# Altium PCB PenAndPaper.PcbDoc
Units mm, origin at the board's own origin, x right, y up, seen from the top; angles counter-clockwise.
Board outline 100 x 45 mm, 2 copper layers (Top Layer, Bottom Layer); 21 components, 19 nets, 120 pads, 40 vias.
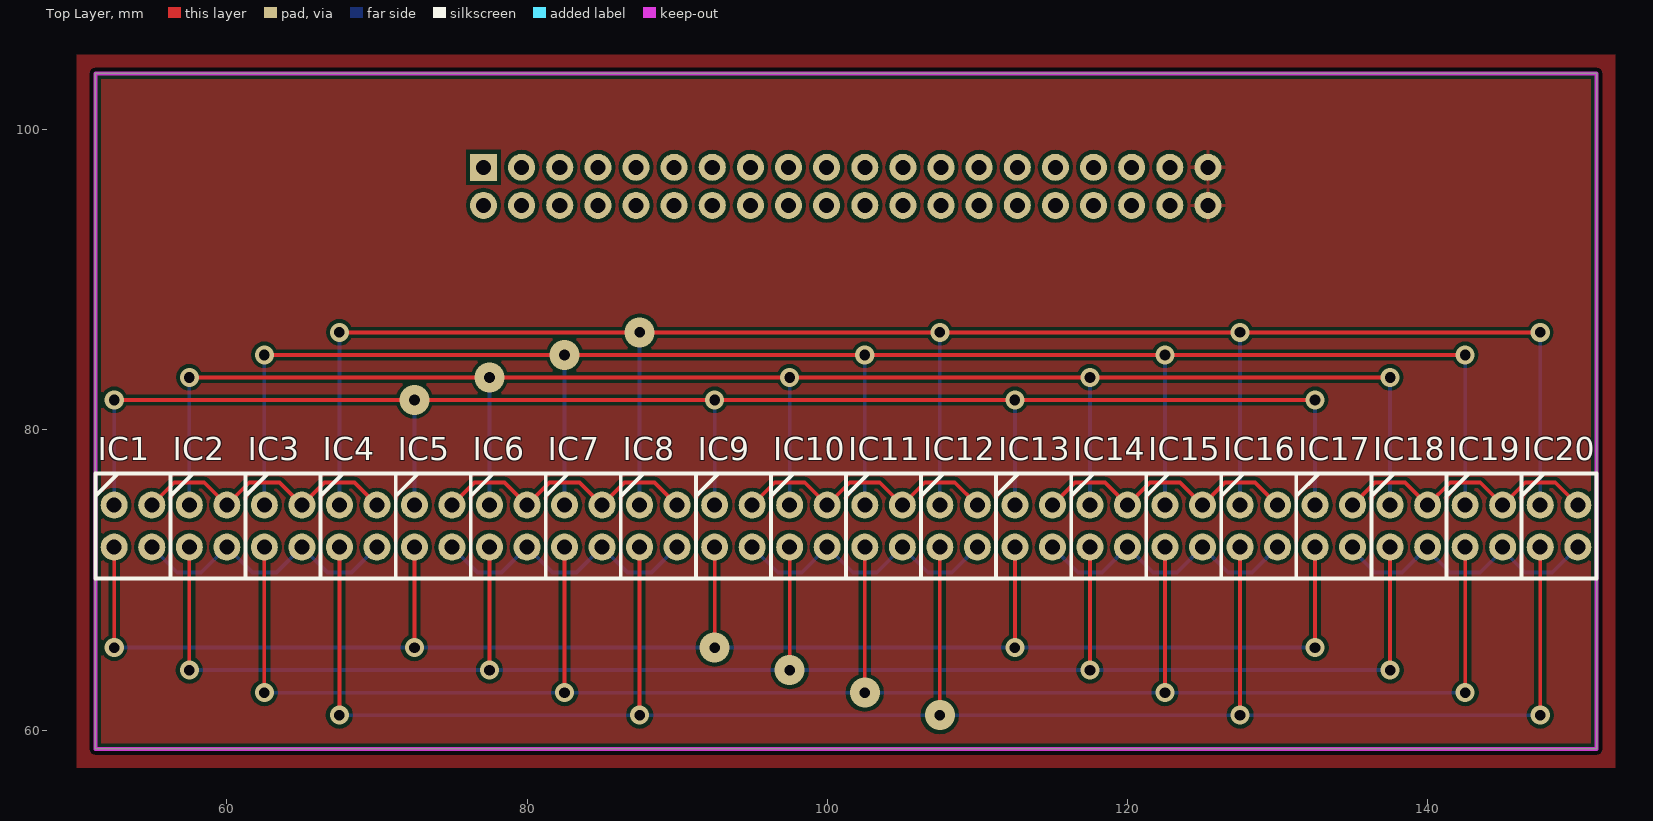
[diagram p0: Top Layer view]
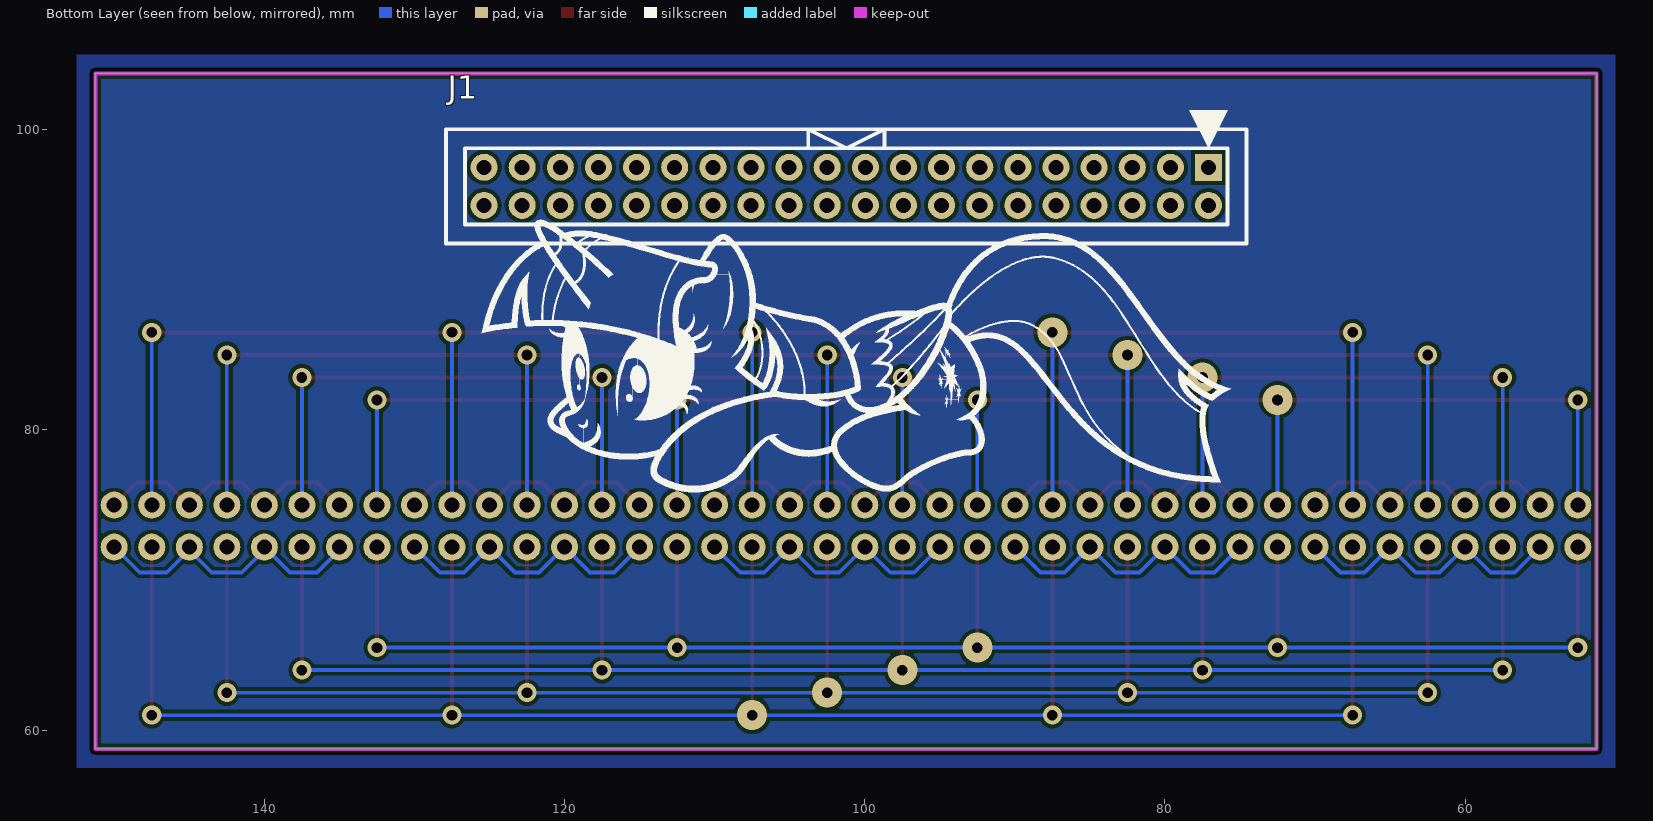
[diagram p1: Bottom Layer view, seen from below]

## Layer stack, top to bottom
Top Solder: solder mask 0.0102, Solder Resist, Dk 3.5
Top Layer: signal copper 0.0356
Dielectric 1: dielectric 0.32, FR-4, Dk 4.8
Bottom Layer: signal copper 0.0356
Bottom Solder: solder mask 0.0102, Solder Resist, Dk 3.5

## Board outline
51.25,58.75 51.25,103.75 151.25,103.75 151.25,58.75

## Design rules (kind name [scope] priority, off if disabled: settings)
Clearance [All] p1: gap=0.254
ComponentClearance [All] p1 off: gap=0.254 collisioncheckmode=3 verticalgap=0.254 showdistances=FALSE
PolygonConnect [All] p1: connectstyle=Relief reliefconductorwidth=0.254 reliefentries=4 polygonreliefangle="90 Angle" airgapwidth=0.254
RoutingVias [All] p1: holewidth=0.711 width=1.27 viastyle="Through Hole" minholewidth=0.711 minwidth=1.27 maxholewidth=0.711 maxwidth=1.27
SolderMaskExpansion [All] p1: expansion=0.102
Width [All] p1: maxlimit=0.254 minlimit=0.254 preferedwidth=0.254
29 further rules are at their usual default settings.

## Components (designator, comment, footprint, x,y, rotation, side; value= is the part's Value field where it differs from the comment)
IC1 "RPR-220" RPR_220 53.75,73.6 r90 top
IC2 "RPR-220" RPR_220 58.75,73.6 r90 top
IC3 "RPR-220" RPR_220 63.75,73.6 r90 top
IC4 "RPR-220" RPR_220 68.75,73.6 r90 top
IC5 "RPR-220" RPR_220 73.75,73.6 r90 top
IC6 "RPR-220" RPR_220 78.75,73.6 r90 top
IC7 "RPR-220" RPR_220 83.75,73.6 r90 top
IC8 "RPR-220" RPR_220 88.75,73.6 r90 top
IC9 "RPR-220" RPR_220 93.75,73.6 r90 top
IC10 "RPR-220" RPR_220 98.75,73.6 r90 top
IC11 "RPR-220" RPR_220 103.75,73.6 r90 top
IC12 "RPR-220" RPR_220 108.75,73.6 r90 top
IC13 "RPR-220" RPR_220 113.75,73.6 r90 top
IC14 "RPR-220" RPR_220 118.75,73.6 r90 top
IC15 "RPR-220" RPR_220 123.75,73.6 r90 top
IC16 "RPR-220" RPR_220 128.75,73.6 r90 top
IC17 "RPR-220" RPR_220 133.75,73.6 r90 top
IC18 "RPR-220" RPR_220 138.75,73.6 r90 top
IC19 "RPR-220" RPR_220 143.75,73.6 r90 top
IC20 "RPR-220" RPR_220 148.75,73.6 r90 top
J1 "Header" PINHD_2.54_2X40 87.26,94.96 r270 bottom

## Footprints (in the part's own frame and the unit in brackets; to place one, negate y for a bottom-side part, rotate by r counter-clockwise, add the part's x,y. Pads: shape width x height; smd on the part's side, far side on the other; paste and mask are expansions set on the pad)
PINHD_2.54_2X40 [mm] "Pin Header 2.54mm 2x40Pin"
  rect 1.8x1.8 hole 1: 1(-2.54,10.16)
  round 1.8 hole 1: 2(0,10.16) 3(-2.54,7.62) 4(0,7.62) 5(-2.54,5.08) 6(0,5.08) 7(-2.54,2.54) 8(0,2.54) 9(-2.54,0) 10(0,0) 11(-2.54,-2.54) 12(0,-2.54) 13(-2.54,-5.08) 14(0,-5.08) 15(-2.54,-7.62) 16(0,-7.62) 17(-2.54,-10.16) 18(0,-10.16) 19(-2.54,-12.7) 20(0,-12.7) 21(-2.54,-15.24) 22(0,-15.24) 23(-2.54,-17.78) 24(0,-17.78) 25(-2.54,-20.32) 26(0,-20.32) 27(-2.54,-22.86) 28(0,-22.86) 29(-2.54,-25.4) 30(0,-25.4) 31(-2.54,-27.94) 32(0,-27.94) 33(-2.54,-30.48) 34(0,-30.48) 35(-2.54,-33.02) 36(0,-33.02) 37(-2.54,-35.56) 38(0,-35.56) 39(-2.54,-38.1) 40(0,-38.1)
  silkscreen extent -6.35,-40.64 2.54,12.7
RPR_220 [mm] "RPR-220 Infrared reflective photo sensor"
  round 1.8 hole 1: 1(-1.4,-1.25) 2(-1.4,1.25) 3(1.4,1.25) 4(1.4,-1.25)
  silkscreen extent -3.5,-2.5 3.5,2.5

## Part data
IC1 IC2 IC3 IC4 IC5 IC6 IC7 IC8 IC9 IC10 IC11 IC12 IC13 IC14 IC15 IC16 IC17 IC18 IC19 IC20: "Infrared Reflex Photosensor"
J1: library part PINHD_2x40, "Pin Header 2x40P"

## Via types
v1: diameter 1.27, hole 0.711, Top Layer to Bottom Layer, 32 vias
v2: diameter 2, hole 0.711, Top Layer to Bottom Layer, 8 vias

## Nets (pads, with @x,y where several pads share a name; then routed paths per layer and width w, separated by ;. In a path a pad name is that pad's centre, name@x,y a point inside that pad or via, vN(x,y) a via of type N, cw(c..) or ccw(c..) an arc to the next point about the centre after c; other vN are vias at no path point)
A1: IC1.1 IC2.1 IC3.1 IC4.1 | length 19.2
  Bottom Layer w0.254: IC1.1 56.7,70.5 58.3,70.5 IC2.1 61.7,70.5 63.3,70.5 IC3.1 66.7,70.5 68.3,70.5 IC4.1
A2: IC5.1 IC6.1 IC7.1 IC8.1 | length 19.2
  Bottom Layer w0.254: IC5.1 76.7,70.5 78.3,70.5 IC6.1 81.7,70.5 83.3,70.5 IC7.1 86.7,70.5 88.3,70.5 IC8.1
A3: IC9.1 IC10.1 IC11.1 IC12.1 | length 19.2
  Bottom Layer w0.254: IC9.1 96.7,70.5 98.3,70.5 IC10.1 101.7,70.5 103.3,70.5 IC11.1 106.7,70.5 108.3,70.5 IC12.1
A4: IC13.1 IC14.1 IC15.1 IC16.1 | length 19.2
  Bottom Layer w0.254: IC13.1 116.7,70.5 118.3,70.5 IC14.1 121.7,70.5 123.3,70.5 IC15.1 126.7,70.5 128.3,70.5 IC16.1
A5: IC17.1 IC18.1 IC19.1 IC20.1 | length 20.4
  Bottom Layer w0.254: IC17.1@135,72.5 135,72 136.5,70.5 138.3,70.5 139.9,72.1 141.5,70.5 143.5,70.5 IC19.1@145,72 ; IC19.1@145,72.5 IC19.1 ; IC19.1@145.3,72.2 IC19.1 ; IC20.1 148.3,70.5 146.5,70.5 IC19.1@145,72 ; IC19.1@145,72 IC19.1 ; IC19.1@145,72 IC19.1
C1: IC1.4 IC2.4 IC3.4 IC4.4 | length 18.7
  Top Layer w0.254: IC1.4 56.5,76.5 58.5,76.5 IC2.4 61.5,76.5 63.5,76.5 IC3.4 66.5,76.5 68.5,76.5 IC4.4
C2: IC5.4 IC6.4 IC7.4 IC8.4 | length 18.7
  Top Layer w0.254: IC5.4 76.5,76.5 78.5,76.5 IC6.4 81.5,76.5 83.5,76.5 IC7.4 86.5,76.5 88.5,76.5 IC8.4
C3: IC9.4 IC10.4 IC11.4 IC12.4 | length 18.7
  Top Layer w0.254: IC9.4 96.5,76.5 98.5,76.5 IC10.4 101.5,76.5 103.5,76.5 IC11.4 106.5,76.5 108.5,76.5 IC12.4
C4: IC13.4 IC14.4 IC15.4 IC16.4 | length 18.7
  Top Layer w0.254: IC13.4 116.5,76.5 118.5,76.5 IC14.4 121.5,76.5 123.5,76.5 IC15.4 126.5,76.5 128.5,76.5 IC16.4
C5: IC17.4 IC18.4 IC19.4 IC20.4 | length 18.7
  Top Layer w0.254: IC17.4 136.5,76.5 138.5,76.5 IC18.4 141.5,76.5 143.5,76.5 IC19.4 146.5,76.5 148.5,76.5 IC20.4
E1: IC1.3 IC5.3 IC9.3 IC13.3 IC17.3 | length 115
  Top Layer w0.254: v1(52.5,82) v2(72.5,82) v1(92.5,82) v1(112.5,82) v1(132.5,82)
  Bottom Layer w0.254: IC1.3 v1(52.5,82) ; IC5.3 v2(72.5,82) ; IC9.3 v1(92.5,82) ; IC13.3 v1(112.5,82) ; IC17.3 v1(132.5,82)
E2: IC2.3 IC6.3 IC10.3 IC14.3 IC18.3 | length 122.5
  Top Layer w0.254: v1(57.5,83.5) v2(77.5,83.5) v1(97.5,83.5) v1(117.5,83.5) v1(137.5,83.5)
  Bottom Layer w0.254: IC2.3 v1(57.5,83.5) ; IC6.3 v2(77.5,83.5) ; IC10.3 v1(97.5,83.5) ; IC14.3 v1(117.5,83.5) ; IC18.3 v1(137.5,83.5)
E3: IC3.3 IC7.3 IC11.3 IC15.3 IC19.3 | length 130
  Top Layer w0.254: v1(62.5,85) v2(82.5,85) v1(102.5,85) v1(122.5,85) v1(142.5,85)
  Bottom Layer w0.254: IC3.3 v1(62.5,85) ; IC7.3 v2(82.5,85) ; IC11.3 v1(102.5,85) ; IC15.3 v1(122.5,85) ; IC19.3 v1(142.5,85)
E4: IC4.3 IC8.3 IC12.3 IC16.3 IC20.3 | length 137.5
  Top Layer w0.254: v1(67.5,86.5) v2(87.5,86.5) v1(107.5,86.5) v1(127.5,86.5) v1(147.5,86.5)
  Bottom Layer w0.254: IC4.3 v1(67.5,86.5) ; IC8.3 v2(87.5,86.5) ; IC12.3 v1(107.5,86.5) ; IC16.3 v1(127.5,86.5) ; IC20.3 v1(147.5,86.5)
GND: J1.39 J1.40
K1: IC1.2 IC5.2 IC9.2 IC13.2 IC17.2 | length 114.5
  Top Layer w0.254: v1(52.5,65.5) IC1.2@52.5,72.5 ; v1(72.5,65.5) IC5.2@72.5,72.5 ; v2(92.5,65.5) IC9.2 ; v1(112.5,65.5) IC13.2 ; v1(132.5,65.5) IC17.2@132.5,72.5
  Bottom Layer w0.254: v1(52.5,65.5) v1(72.5,65.5) v2(92.5,65.5) v1(112.5,65.5) v1(132.5,65.5) ; IC9.2 IC9.2@92.5,72.25
K2: IC2.2 IC6.2 IC10.2 IC14.2 IC18.2 | length 121.9
  Top Layer w0.254: v1(57.5,64) IC2.2@57.5,72.5 ; v1(77.5,64) IC6.2@77.5,72.5 ; v2(97.5,64) IC10.2 ; v1(117.5,64) IC14.2 ; v1(137.5,64) IC18.2@137.5,72.5
  Bottom Layer w0.254: v1(57.5,64) v1(77.5,64) v2(97.5,64) v1(117.5,64) v1(137.5,64)
K3: IC3.2 IC7.2 IC11.2 IC15.2 IC19.2 | length 129.1
  Top Layer w0.254: v1(62.5,62.5) IC3.2@62.5,72.5 ; v1(82.5,62.5) IC7.2 ; v2(102.5,62.5) IC11.2 ; v1(122.5,62.5) IC15.2 ; v1(142.5,62.5) IC19.2@142.5,72.5
  Bottom Layer w0.254: v1(62.5,62.5) v1(82.5,62.5) v2(102.5,62.5) v1(122.5,62.5) v1(142.5,62.5)
K4: IC4.2 IC8.2 IC12.2 IC16.2 IC20.2 | length 136.9
  Top Layer w0.254: v1(67.5,61) IC4.2@67.5,72.5 ; v1(87.5,61) IC8.2 ; v2(107.5,61) IC12.2 ; v1(127.5,61) IC16.2 IC16.2@127.5,72.5 ; v1(147.5,61) IC20.2@147.5,72.5
  Bottom Layer w0.254: v1(67.5,61) v1(87.5,61) v2(107.5,61) v1(127.5,61) v1(147.5,61)
pads on no net: J1.1 J1.2 J1.3 J1.4 J1.5 J1.6 J1.7 J1.8 J1.9 J1.10 J1.11 J1.12 J1.13 J1.14 J1.15 J1.16 J1.17 J1.18 J1.19 J1.20 J1.21 J1.22 J1.23 J1.24 J1.25 J1.26 J1.27 J1.28 J1.29 J1.30 J1.31 J1.32 J1.33 J1.34 J1.35 J1.36 J1.37 J1.38

## Polygon pours and split planes (outlines as drawn)
GND on Top Layer "GND_Top" (solid, pour order 0): 50,57.5 152.5,57.5 152.5,105 50,105
no net on Bottom Layer "GND_Bottom" (solid, pour order 2): 50,57.5 152.5,57.5 152.5,105 50,105

## Keep-outs
Keep-Out Layer:
  the board outline again, w0.254

## Silkscreen, mask and mechanical layers (free items; w line width, h text height)
Bottom Overlay:
  region: 8969 vertices and 0 holes, not listed, extent 75.569,75.849 125.53,93.992
Bottom Solder:
  region: 1434 vertices and 0 holes, not listed, extent 76.931,77.17 119.613,91.62